# Altium PCB PCB_Power_Measurement.PcbDoc (part 1 of 2)
Units mil, origin at the board's own origin, x right, y up, seen from the top; angles counter-clockwise.
Board outline 2558.96 x 1849.37 mil, 4 copper layers (Top Layer, Layer 1, Layer 2, Bottom Layer), stack 22.4 mil thick; 69 components, 59 nets, 316 pads, 95 vias.
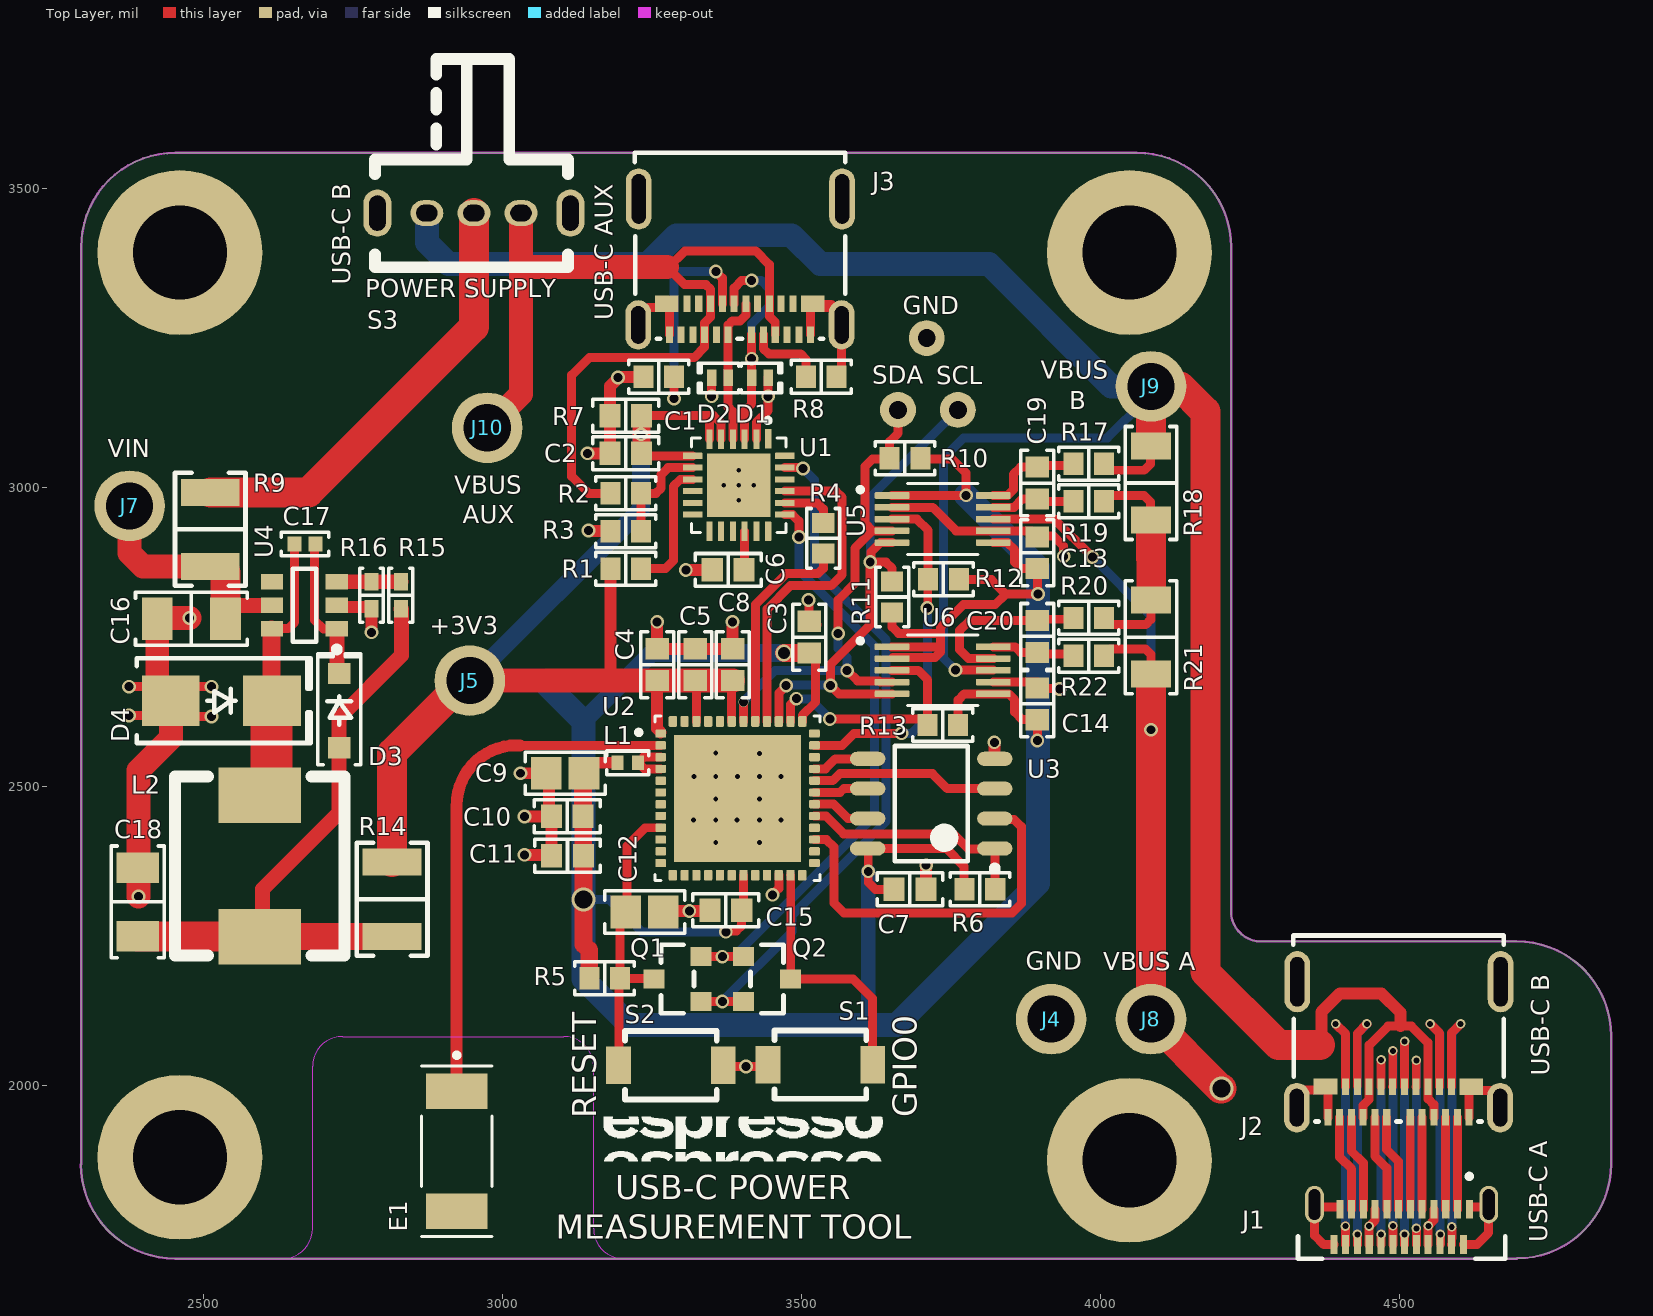
[diagram p0: Top Layer view]
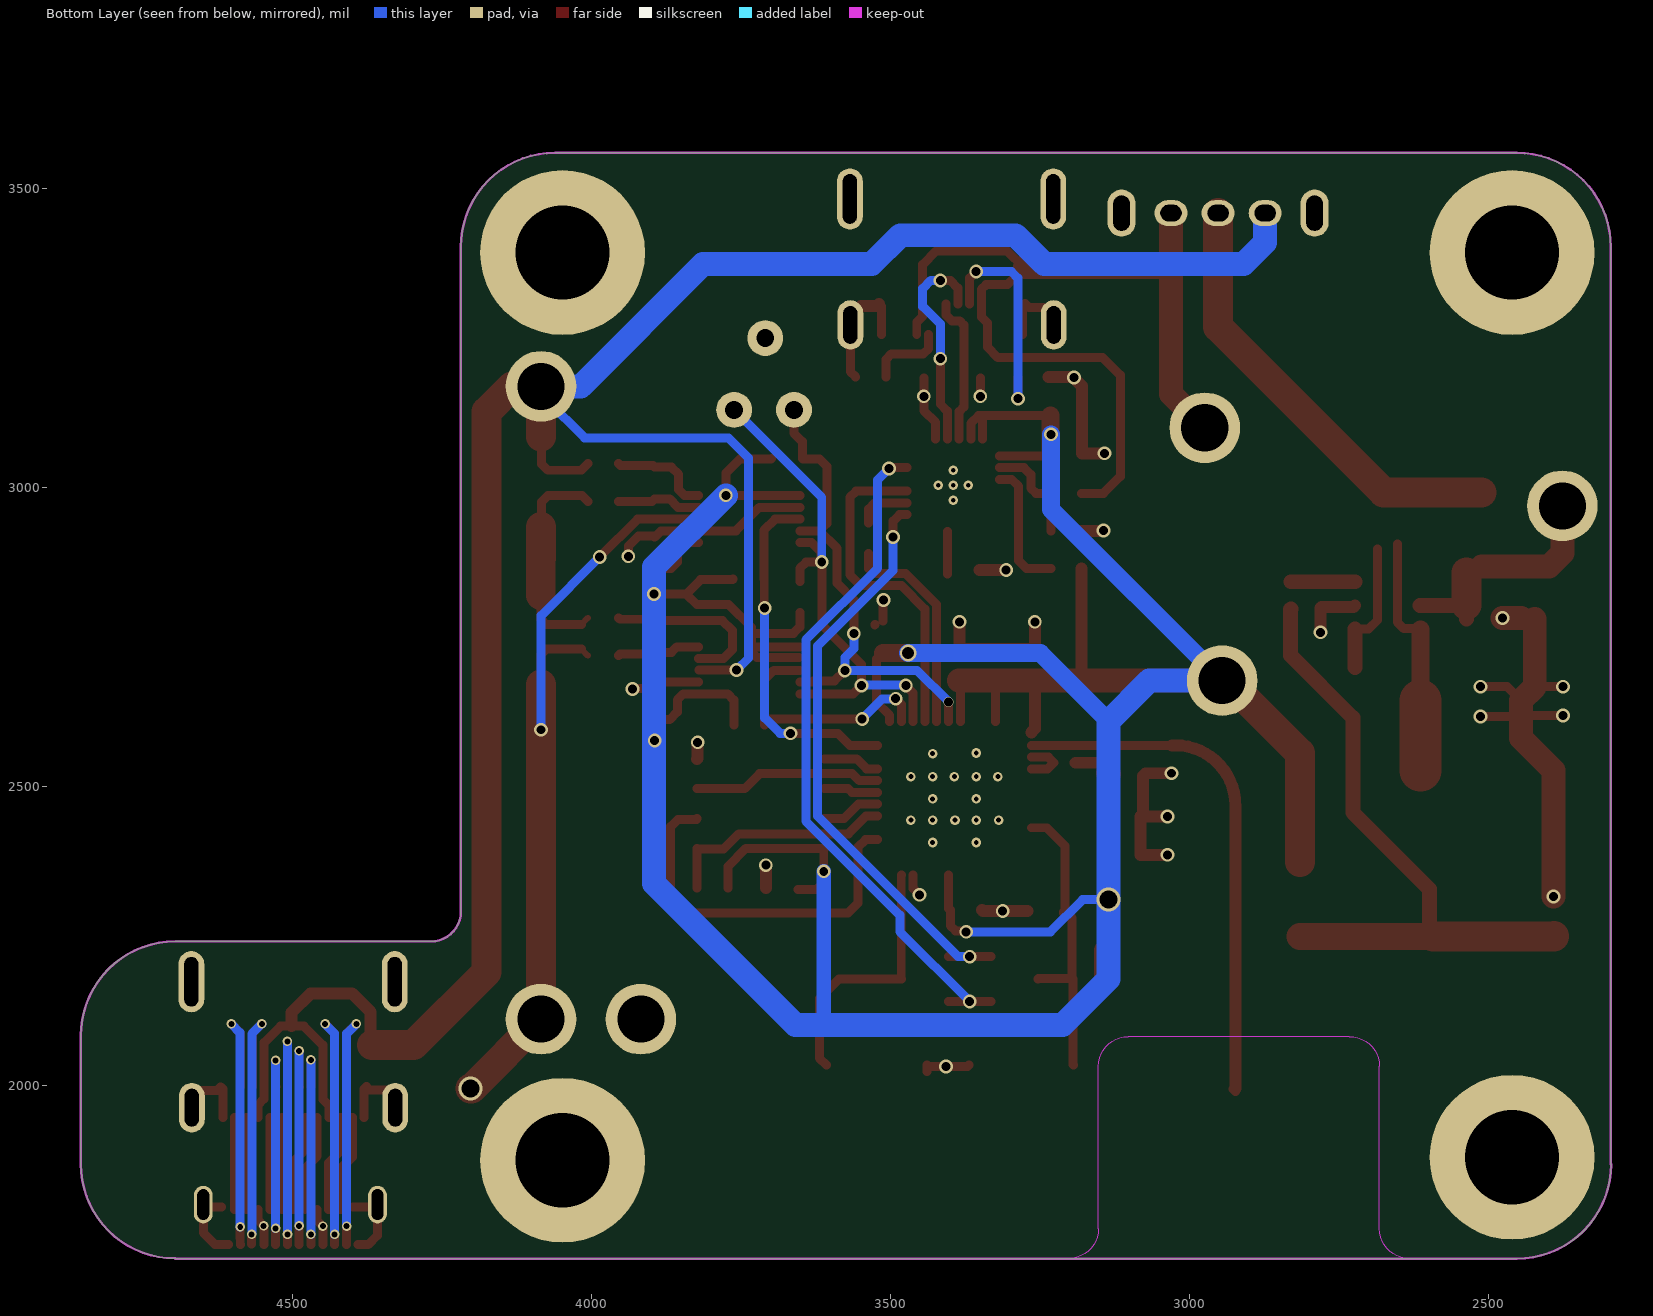
[diagram p1: Bottom Layer view, seen from below]
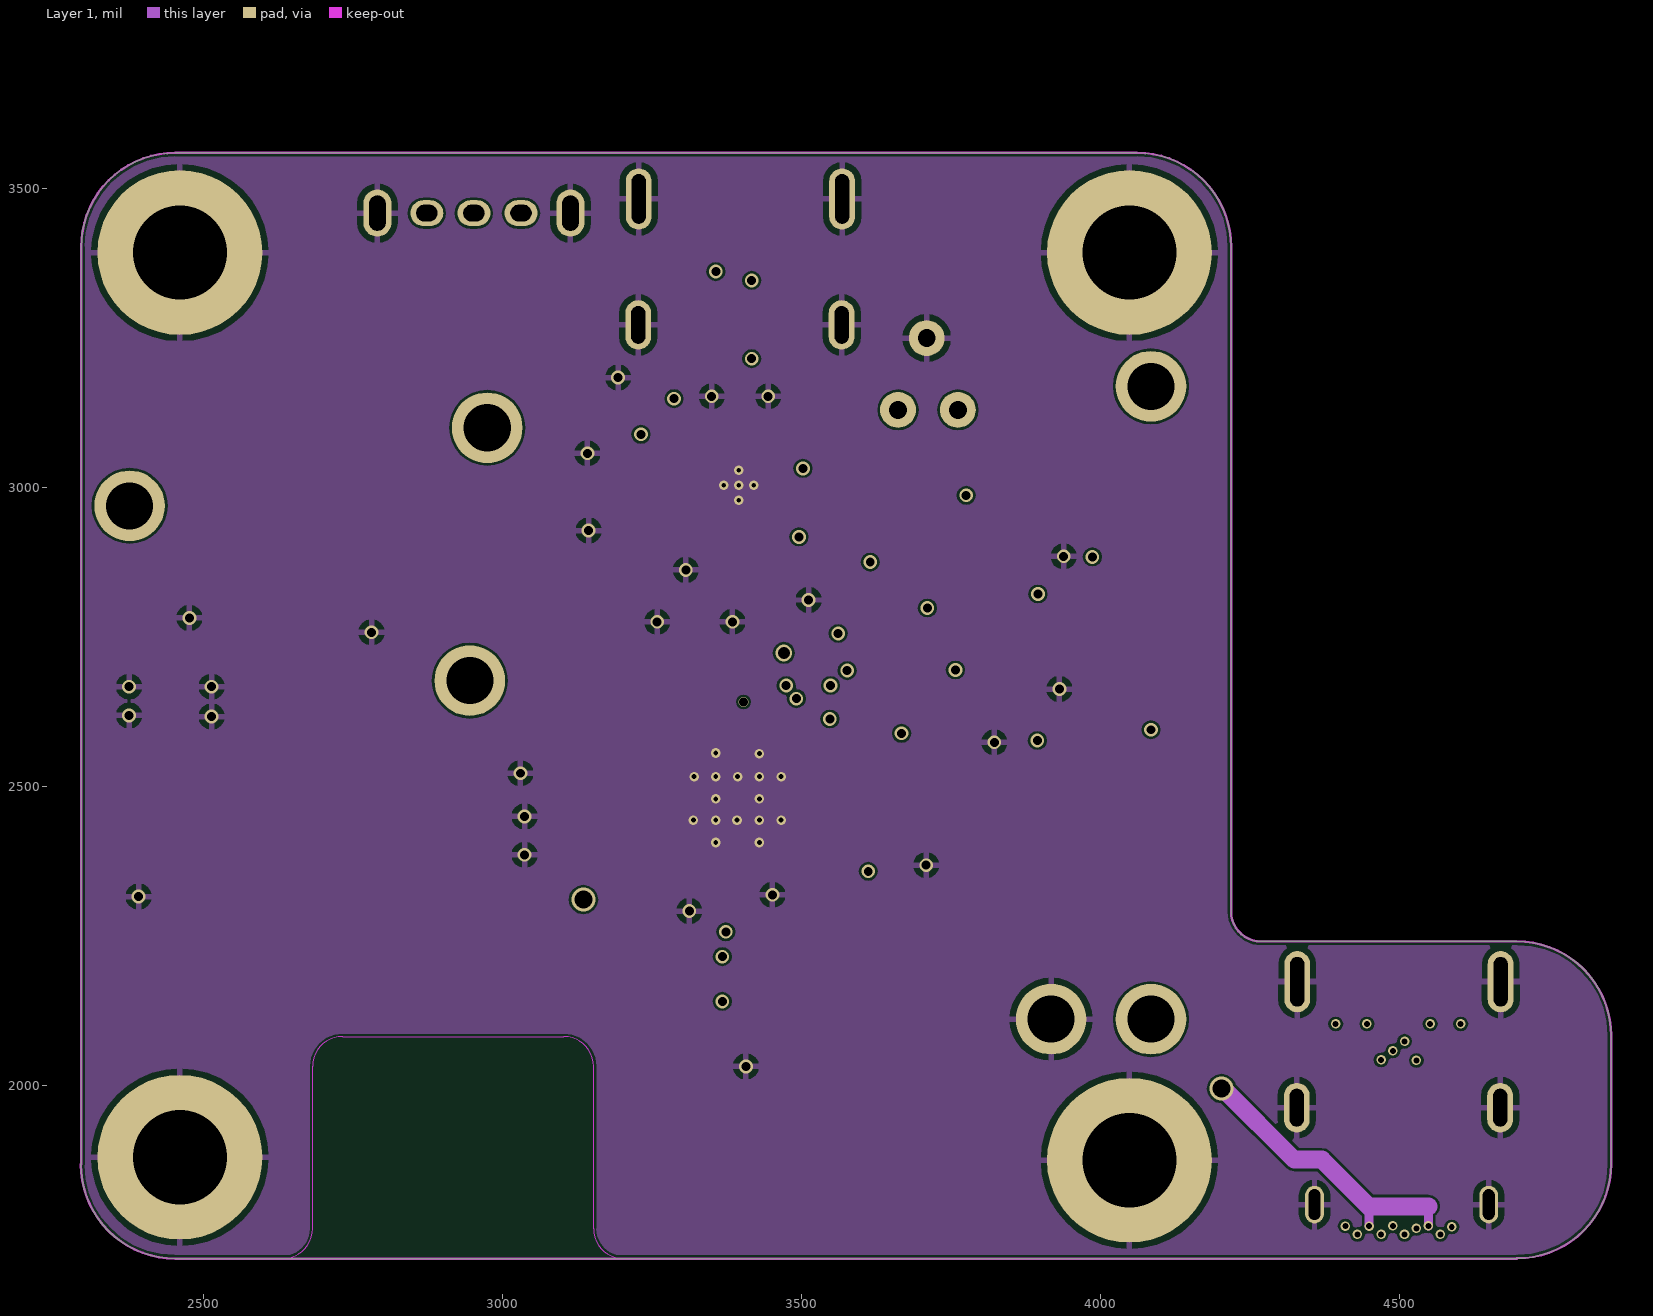
[diagram p2: Layer 1]
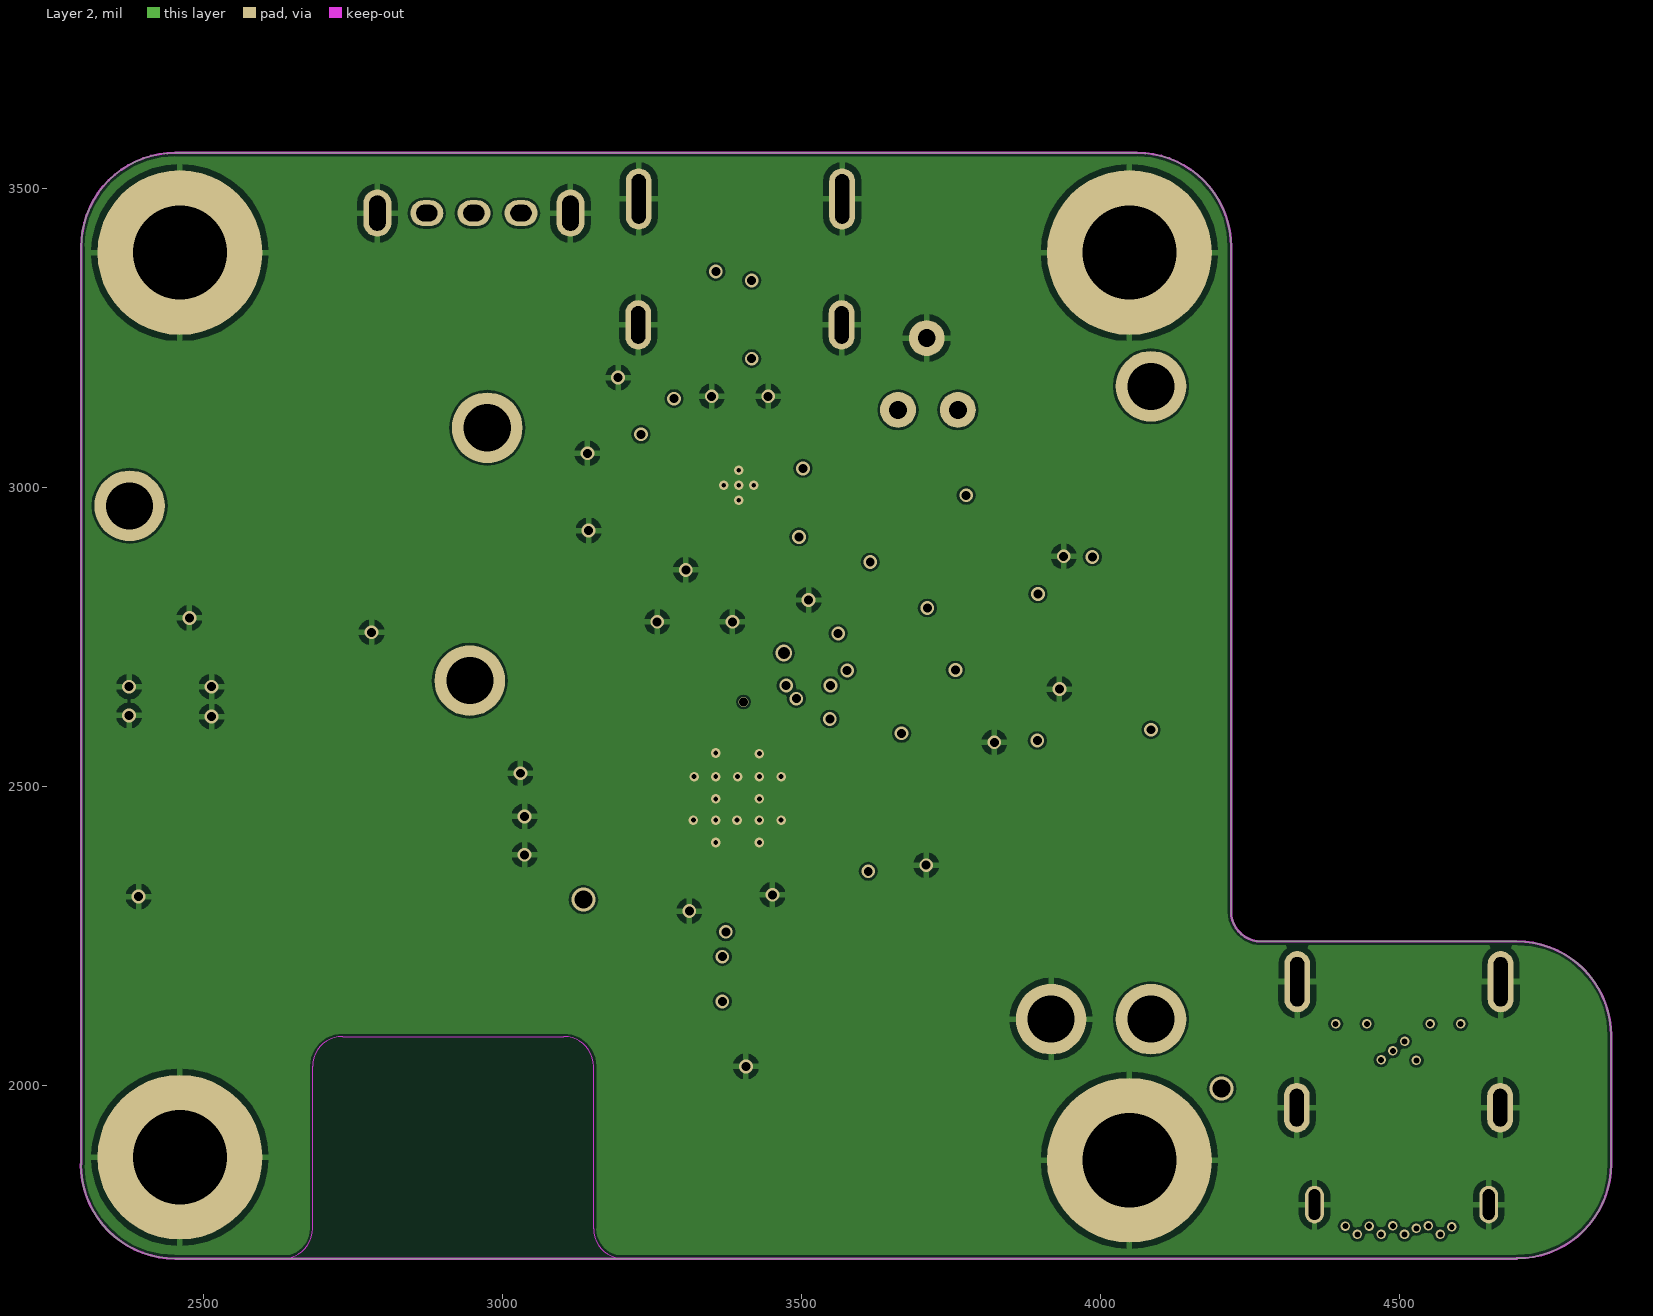
[diagram p3: Layer 2]

## Layer stack, top to bottom
Top Solder: solder mask 0.4, Solder Resist, Dk 3.5
Top Layer: signal copper 1.4
Dielectric 2: prepreg 2.8, PP-006, Dk 4.1
Layer 1: signal copper 0.7
Dielectric 1: dielectric 12.6, FR-4, Dk 4.8
Layer 2: signal copper 0.7
Dielectric 3: prepreg 2.8, PP-006, Dk 4.1
Bottom Layer: signal copper 1.4
Bottom Solder: solder mask 0.4, Solder Resist, Dk 3.5

## Board outline
2296,1868.59 2296,3402.52 cw(c2453.48,3402.52) 2453.48,3560 4061.52,3560 cw(c4061.52,3402.52) 4219,3402.52 4219,2291 ccw(c4269,2291) 4269,2241 4697,2241 cw(c4697,2083.52) 4854.48,2083.52 4854.48,1868.48 cw(c4697,1868.48) 4697,1711 4696.63,1710.63 2453,1710.63 cw(c2453,1868.11)

## Design rules (kind name [scope] priority, off if disabled: settings)
Clearance [All] p1: gap=4 ignorepadtopadclearanceinfootprint=FALSE except(0: Arc-Hole Track-Hole SMDPad-Hole THPad-Hole Via-Hole Fill-Hole Poly-Hole Region-Hole Text-Hole)
HoleSize [All] p1: absolutevalues=TRUE maxlimit=196.85 minlimit=1 maxpercent=80.000 minpercent=20.000
PolygonConnect PolygonConnect_1 [All vs IsNamedPolygon('FTDI-GND-2') Or  IsNamedPolygon('FTDI-GND-1') Or  IsNamedPolygon('ESP-GND-2') Or  IsNamedPolygon('ESP-GND-1')] p1: connectstyle=Direct reliefconductorwidth=10 reliefentries=4 polygonreliefangle="90 Angle" airgapwidth=10
PolygonConnect [All] p2: connectstyle=Relief reliefconductorwidth=10 reliefentries=4 polygonreliefangle="90 Angle" airgapwidth=10
RoutingVias [All] p1: holewidth=28 width=50 viastyle="Through Hole" minholewidth=28 minwidth=50 maxholewidth=28 maxwidth=50
SilkToSilkClearance [All] p1 off: silktosilkclearance=10
SilkToSolderMaskClearance [IsPad] p1: minsilkscreentomaskgap=3 clearancetoexposedcopper=TRUE
SolderMaskExpansion [All] p1: expansion=4
Width [All] p1: maxlimit=100 minlimit=5 preferedwidth=10
27 further rules are at their usual default settings.

## Classes and differential pairs
component class USB-C_Connectors: D1 D2 J1 J2 J3 R7 R8
component class Power_Regulation: C16 C17 C18 D3 D4 J4 J5 J7 J8 J9 J10 L2 R9 R14 R15 R16 S3 U4
component class Power_Measurement: C13 C14 C19 C20 R10 R11 R12 R13 R17 R18 R19 R20 R21 R22 U5 U6
component class Microcontroller: C1 C2 C3 C4 C5 C6 C7 C8 C9 C10 C11 C12 C15 E1 L1 Q1 Q2 R1 R2 R3 R4 R5 R6 S1 S2 U1 U2 U3

## Components (designator, comment, footprint, x,y, rotation, side; value= is the part's Value field where it differs from the comment)
C1 "0.1 µF" "CAP 0603_1608" 3206.69,3120.28 r0 top
C2 "1 µF" "CAP 0603_1608" 3206.69,3057.28 r180 top
C3 "0.1 µF" "CAP 0603_1608" 3513.43,2750 r270 top
C4 "0.1 µF" "CAP 0603_1608" 3259.25,2703.74 r90 top
C5 "100 pF" "CAP 0603_1608" 3322.83,2703.74 r270 top
C6 "4.7 µF" "CAP 0603_1608" 3377.95,2862.2 r180 top
C7 "1 µF" "CAP 0603_1608" 3682,2328 r0 top
C8 "1 µF" "CAP 0603_1608" 3385.83,2703.74 r270 top
C9 "10 µF" "CAP 0805_2012" 3105.31,2522.24 r0 top
C10 "1 µF" "CAP 0603_1608" 3108.82,2450.32 r0 top
C11 "0.1 µF" "CAP 0603_1608" 3109.25,2384.45 r0 top
C12 "10 µF" "CAP 0805_2012" 3238.19,2290.35 r180 top
C13 "0.1 µF" "CAP 0603_1608" 3895,2891 r90 top
C14 "0.1 µF" "CAP 0603_1608" 3895,2638.43 r270 top
C15 "0.1 µF" "CAP 0603_1608" 3374.02,2293.31 r0 top
C16 "10 µF" "CAP 1206_3216 - 0.8MM" 2480.32,2780.51 r0 top
C17 "10000 pF" "CAP 0402_1005" 2670.28,2905.51 r0 top
C18 "22 µF" "CAP 1206_3216 - 0.8MM" 2390.75,2307.09 r90 top
C19 "0.1 µF" "CAP 0603_1608" 3895,3007.63 r90 top
C20 "0.1 µF" "CAP 0603_1608" 3895,2751 r270 top
D1 "LXES15AAA1-153" 0402 3431.1,3183.54 r0 top
D2 "LXES15AAA1-153" 0402 3364.17,3183.54 r180 top
D3 "1N4148W-TP" SOD-123 2727.36,2626.97 r90 top
D4 "B230-13-F" "DO214AA SMB" 2530.51,2643.7 r0 top
E1 "NN01-102" XCVR_NN01-102 2924,1890 r270 top
J1 "USB4155-03-C_REVA" GCT_USB4155-03-C_REVA 4504.17,1763.53 r0 top
J2 "1054500101" "Molex 1054500101" 4498.95,1972.61 r180 top
J3 "1054500101" "Molex 1054500101" 3397.64,3281.69 r180 top
J4 "Large Board Solder Point" "Large Solder Point"#1 3918,2111 r0 top
J5 "Large Board Solder Point" "Large Solder Point"#1 2945.87,2677.17 r0 top
J7 "Large Board Solder Point" "Large Solder Point"#1 2376.97,2969.49 r0 top
J8 "Large Board Solder Point" "Large Solder Point"#1 4085,2111 r0 top
J9 "Large Board Solder Point" "Large Solder Point"#2 4085,3187.99 r0 top
J10 "Large Board Solder Point" "Large Solder Point"#1 2975,3100 r0 top
L1 "2 nH" "IND 0402_1005" 3210,2539.8 r180 top
L2 "10uH" 0630CDMCCDS-100MC 2594.49,2367.13 r270 top
Q1 "MMSS8050-H-TP" "MCCSEMI SOT-23-3" 3293.31,2178.15 r180 top
Q2 "MMSS8050-H-TP" "MCCSEMI SOT-23-3" 3442.91,2178.15 r0 top
R1 "4.7 kOhms" "RES 0603_1608" 3206.69,2864.37 r180 top
R2 "24 kOhms" "RES 0603_1608" 3206.69,2990.35 r180 top
R3 "47 kOhms" "RES 0603_1608" 3206.69,2927.17 r0 top
R4 "510 Ohms" "RES 0603_1608" 3537,2915 r90 top
R5 "10 kOhms" "RES 0603_1608" 3171.26,2179.13 r0 top
R6 "10 kOhms" "RES 0603_1608" 3799,2328 r0 top
R7 "5.1 kOhms" "RES 0603_1608" 3261.81,3185.04 r0 top
R8 "5.1 kOhms" "RES 0603_1608" 3533.46,3185.04 r0 top
R9 "0 Ohms" "RES 1210_3225" 2511.81,2930.12 r270 top
R10 "10 kOhms" "RES 0603_1608" 3673.59,3049 r180 top
R11 "10 kOhms" "RES 0603_1608" 3652,2817 r90 top
R12 "10 kOhms" "RES 0603_1608" 3738,2847 r180 top
R13 "10 kOhms" "RES 0603_1608" 3737,2603 r180 top
R14 "0 Ohms" "RES 1210_3225" 2815.94,2311.52 r90 top
R15 "100 kOhms" "RES 0402_1005" 2830.71,2819.88 r270 top
R16 "32.4 kOhms" "RES 0402_1005" 2781.5,2819.88 r90 top
R17 "10 Ohms" "RES 0603_1608" 3981,3040 r180 top
R18 "2 mOhms" "STACKPOLE CSR1206" 4085,3007.64 r90 top
R19 "10 Ohms" "RES 0603_1608" 3981,2977 r180 top
R20 "10 Ohms" "RES 0603_1608" 3981,2782 r180 top
R21 "2 mOhms" "STACKPOLE CSR1206" 4085,2750 r90 top
R22 "10 Ohms" "RES 0603_1608" 3981,2719 r180 top
S1 "GT-TC029B-H025-L1N" GT-TC029B-H025-L1N 3532,2035 r180 top
S2 "GT-TC029B-H025-L1N" GT-TC029B-H025-L1N 3282,2034 r180 top
S3 "SK-12D02-VG5" SK-12D02-VG5 2952.76,3459 r180 top
U1 "CP2104-F03-GM" QFN50P400X400X80-25N 3395.67,3003.94 r270 top
U2 "ESP32-PICO-D4" PQFN50P700X700X104-49N 3393.7,2480.31 r0 top
U3 "LY68L6400" SOP-8_3.9x4.9x1.27P 3717.52,2471.46 r180 top
U4 "RT8258GE" SOT100P279X130-6N 2669.29,2803.15 r180 top
U5 "INA226AIDGSR" SOP50P490X110-10N 3736.65,2947.37 r0 top
U6 "INA226AIDGSR" SOP50P490X110-10N 3736.65,2694.35 r0 top

## Footprints (in the part's own frame and the unit in brackets; to place one, negate y for a bottom-side part, rotate by r counter-clockwise, add the part's x,y. Pads: shape width x height; smd on the part's side, far side on the other; paste and mask are expansions set on the pad)
0402 [mm] "SODFL, 2-Leads, Body 0.675x1.075mm, IPC Medium Density"
  rect 0.4x0.7 smd: 1(-0.35,0) 2(0.35,0)
  silkscreen extent -0.8,-0.63 0.92,0.63, body extent -0.51,-0.31 0.5,0.3, height 0.45
0630CDMCCDS-100MC [mm] "SMD,7x6.6x2.8mm"
  rect 2.35x3.5 smd: 1(-3,0) 2(3,0)
  silkscreen extent -3.8,-3.6 3.8,3.6, body extent -3.5,-3.3 3.5,3.3, height 3
"CAP 0402_1005" [mm] "Chip Capacitor, 2-Leads, Body 1.02x0.51mm, IPC Medium Density"
  rect 0.6x0.64 smd: 1(-0.44,0) 2(0.44,0)
  silkscreen extent -1,-0.5 1,0.5, body extent -0.5,-0.26 0.5,0.26, height 0.52
"CAP 0603_1608" [mm] "Chip Capacitor, 2-Leads, Body 1.60x0.80mm, IPC Medium Density"
  rect 0.9x1 smd: 1(-0.675,0) 2(0.675,0)
  silkscreen extent -1.4,-0.7 1.4,0.7, body extent -0.8,-0.41 0.8,0.41, height 0.82
"CAP 0805_2012" [mm] "Chip Capacitor, 2-Leads, Body 2.00x1.20mm, IPC Medium Density"
  rect 1.3x1.4 smd mask+0.051: 1(-0.8,0) 2(0.8,0)
  silkscreen extent -1.7,-0.9 1.7,0.9, body extent -1,-0.64 1,0.64, height 1.26
"CAP 1206_3216 - 0.8MM" [mm] "Chip Capacitor, 2-Leads, Body 3.25x1.60mm, IPC Medium Density"
  rect 1.3x1.8 smd: 1(-1.45,0) 2(1.45,0)
  silkscreen extent -2.37,-1.12 2.37,1.12, body extent -1.6,-0.8 1.6,0.8, height 0.8
"DO214AA SMB" [mm] "Molded Diode, 2-Leads, Body 4.31x3.62mm, IPC Medium Density"
  rect 2.45x2.15 smd: 1(-2.15,0) 2(2.15,0)
  silkscreen extent -3.6,-1.8 3.8,1.8, body extent -2.6,-1.8 2.6,1.8, height 2.4
GCT_USB4155-03-C_REVA [mm]
  rect 0.3x0.8 smd: A1(2.875,0.75) A2(2.375,0.75) A3(1.875,0.75) A4(1.375,0.75) A5(0.875,0.75) A6(0.375,0.75) A7(-0.125,0.75) A8(-0.625,0.75) A9(-1.125,0.75) A10(-1.625,0.75) A11(-2.125,0.75) A12(-2.625,0.75) B1(-2.875,-0.75) B2(-2.375,-0.75) B3(-1.875,-0.75) B4(-1.375,-0.75) B5(-0.875,-0.75) B6(-0.375,-0.75) B7(0.125,-0.75) B8(0.625,-0.75) B9(1.125,-0.75) B10(1.625,-0.75) B11(2.125,-0.75) B12(2.625,-0.75)
  oval 0.8x1.6 hole 0.5 slot 1.3 at 90 deg mask+0: S1(-3.7,0.95) S2(3.7,0.95)
  silkscreen extent -4.4,-1.35 4.4,2.25
GT-TC029B-H025-L1N [mm] "C843669 No NO SMDSplicing 50mA 3.9mm 100MO 100000 12V 250gf@±30gf 2.9mm -30?~+85? 2.5mm Black Round Button Brick nogging SPST SMD Tactile Switches ROHS"
  rect 1.05x1.6 smd: 1(-2.225,0) 2(2.225,0)
  silkscreen extent -1.95,-1.45 1.95,1.45
"IND 0402_1005" [mm] "Inductor, 2-Leads, Body 1.02x0.51mm, IPC Medium Density"
  rect 0.5x0.6 smd: 1(-0.44,0) 2(0.44,0)
  silkscreen extent -0.9,-0.5 0.9,0.5, body extent -0.5,-0.3 0.5,0.3, height 0.6
"Large Solder Point"#1 [mm]
  round 3 hole 2: 1(0,0)
"Large Solder Point"#2 [mm]
  round 3 hole 2: 1(0,-0.475)
"MCCSEMI SOT-23-3" [mm] "SOT23, 3-Leads, Body 2.92x2.37mm, Pitch 0.95mm, IPC Medium Density"
  rect 0.9x0.8 smd: 1(-1,0.95) 2(-1,-0.95) 3(1,0)
  silkscreen extent -0.7,-1.45 0.7,1.45, body extent -1.16,-1.45 1.16,1.45, height 1.5
"Molex 1054500101" [mm] "USB-C Receptacle Connector 24 Position Surface Mount, 24 Position, Body 8.94x7.90mm"
  rect 0.3x0.7 smd mask+0.051: A1(-3,0.655) A2(-2.5,0.655) A3(-2,0.655) A4(-1.5,0.655) A5(-1,0.655) A6(-0.5,0.655) A7(0.5,0.655) A8(1,0.655) A9(1.5,0.655) A10(2,0.655) A11(2.5,0.655) A12(3,0.655) B2(2.25,-0.645) B3(1.75,-0.645) B4(1.25,-0.645) B5(0.75,-0.645) B6(0.25,-0.645) B7(-0.25,-0.645) B8(-0.75,-0.645) B9(-1.25,-0.645) B10(-1.75,-0.645) B11(-2.25,-0.645)
  rect 1x0.7 smd mask+0.051: B1(3.1,-0.655) B12(-3.1,-0.645)
  oval 1.1x2.6 hole 2.1 slot 0.6 at 0 deg: S(-4.34,-5.105) S(4.3,-5.105)
  oval 1.1x2.1 hole 1.6 slot 0.6 at 0 deg: S(-4.32,0.245) S(4.32,0.245)
  silkscreen extent -4.47,-7.07 4.47,0.83, body extent -4.47,-7.07 4.47,0.83, height 3.21
PQFN50P700X700X104-49N [mm]
  rrect25% 0.45x0.35 smd mask+0.051: 1(-3.265,2.75) 2(-3.265,2.25) 3(-3.265,1.75) 4(-3.265,1.25) 5(-3.265,0.75) 6(-3.265,0.25) 7(-3.265,-0.25) 8(-3.265,-0.75) 9(-3.265,-1.25) 10(-3.265,-1.75) 11(-3.265,-2.25) 12(-3.265,-2.75) 25(3.265,-2.75) 26(3.265,-2.25) 27(3.265,-1.75) 28(3.265,-1.25) 29(3.265,-0.75) 30(3.265,-0.25) 31(3.265,0.25) 32(3.265,0.75) 33(3.265,1.25) 34(3.265,1.75) 35(3.265,2.25) 36(3.265,2.75)
  rrect25% 0.35x0.45 smd mask+0.051: 13(-2.75,-3.265) 14(-2.25,-3.265) 15(-1.75,-3.265) 16(-1.25,-3.265) 17(-0.75,-3.265) 18(-0.25,-3.265) 19(0.25,-3.265) 20(0.75,-3.265) 21(1.25,-3.265) 22(1.75,-3.265) 23(2.25,-3.265) 24(2.75,-3.265) 37(2.75,3.265) 38(2.25,3.265) 39(1.75,3.265) 40(1.25,3.265) 41(0.75,3.265) 42(0.25,3.265) 43(-0.25,3.265) 44(-0.75,3.265) 45(-1.25,3.265) 46(-1.75,3.265) 47(-2.25,3.265) 48(-2.75,3.265)
  rect 5.4x5.4 smd paste-4 mask+0.051: 49(0,0)
  silkscreen extent -4.3,-3.5 3.5,3.5, body extent -3.5,-3.5 3.5,3.5, height 1.04
QFN50P400X400X80-25N [mm]
  rrect7% 0.84x0.26 smd mask+0.051: 1(-1.97,1.25)
  rrect7% 0.82x0.26 smd mask+0.051: 2(-1.955,0.75) 3(-1.955,0.25) 4(-1.955,-0.25) 5(-1.955,-0.75) 6(-1.955,-1.25) 13(1.955,-1.25) 14(1.955,-0.75) 15(1.955,-0.25) 16(1.955,0.25) 17(1.955,0.75) 18(1.955,1.25)
  rrect7% 0.26x0.82 smd mask+0.051: 7(-1.25,-1.955) 8(-0.75,-1.955) 9(-0.25,-1.955) 10(0.25,-1.955) 11(0.75,-1.955) 12(1.25,-1.955) 19(1.25,1.955) 20(0.75,1.955) 21(0.25,1.955) 22(-0.25,1.955) 23(-0.75,1.955) 24(-1.25,1.955)
  rect 2.7x2.7 smd paste-2 mask+0.051: 25(0,0)
  silkscreen extent -2.85,-2 2,2, body extent -2,-2 2,2, height 0.8
"RES 0402_1005" [mm] "Chip Resistor, 2-Leads, Body 1.0x0.5mm, IPC Medium Density"
  rect 0.75x0.6 smd: 1(-0.575,0) 2(0.575,0)
  silkscreen extent -1.14,-0.51 1.14,0.51, body extent -0.5,-0.25 0.5,0.25, height 0.35
"RES 0603_1608" [mm] "Chip Resistor, 2-Leads, Body 1.60x0.80mm, IPC Medium Density"
  rect 0.85x0.95 smd: 1(-0.65,0) 2(0.65,0)
  silkscreen extent -1.27,-0.7 1.27,0.7, body extent -0.8,-0.4 0.8,0.4, height 0.45
"RES 1210_3225" [mm] "Chip Resistor, 2-Leads, Body 3.1x2.6mm, IPC Medium Density"
  rect 1.15x2.5 smd: 1(-1.575,0) 2(1.575,0)
  silkscreen extent -2.4,-1.5 2.4,1.5, body extent -1.6,-1.25 1.6,1.25, height 0.7
SK-12D02-VG5 [mm] "SPDT Switch"
  oval 1.4x1.1 hole 0.7 slot 0.9 at 0 deg: 1(-2,0) 2(0,0) 3(2,0)
  oval 1.2x2 hole 1.5 slot 0.7 at 0 deg: 4(4.1,0) 5(-4.1,0)
  silkscreen extent -4,-6.55 4.2,2.3
SOD-123 [mm] "SOD, 2-Leads, Body 1.55x3.70mm, IPC Medium Density"
  rect 0.9x0.95 smd: 1(-1.575,0) 2(1.575,0)
  silkscreen extent -2.3,-0.92 2.41,0.92, body extent -1.86,-0.78 1.86,0.77, height 1.35
SOP50P490X110-10N [mm]
  rrect25% 1.47x0.28 smd: 1(-2.15,1) 2(-2.15,0.5) 3(-2.15,0) 4(-2.15,-0.5) 5(-2.15,-1) 6(2.15,-1) 7(2.15,-0.5) 8(2.15,0) 9(2.15,0.5) 10(2.15,1)
  silkscreen extent -3.6,-1.5 1.5,1.5, body extent -2.45,-1.5 2.45,1.5, height 1.1
SOP-8_3.9x4.9x1.27P [mm] "SOP, 8-Leads, Body 4.90x3.90mm, Pitch 1.27mm, IPC Medium Density"
  oval 1.5x0.6 smd: 1(-2.7,1.905) 2(-2.7,0.635) 3(-2.7,-0.635) 4(-2.7,-1.905) 5(2.7,-1.905) 6(2.7,-0.635) 7(2.7,0.635) 8(2.7,1.905)
  silkscreen extent -2.83,-2.45 1.55,2.88, body extent -1.95,-2.45 1.95,2.45, height 1.75
SOT100P279X130-6N [mm] "SOT23, 6-Leads, Body 2.90x2.79mm, Pitch 1.00mm, IPC Medium Density"
  rect 0.95x0.65 smd: 1(-1.375,1) 2(-1.375,0) 3(-1.375,-1) 4(1.375,-1) 5(1.375,0) 6(1.375,1)
  silkscreen extent -1.5,-1.55 0.5,2, body extent -0.9,-1.55 0.9,1.55, height 1.3
"STACKPOLE CSR1206" [mm] "Chip Resistor, 2-Leads, Body 3.13x1.55mm, IPC Medium Density"
  rect 1.15x1.7 smd: 1(-1.575,0) 2(1.575,0)
  silkscreen extent -2.4,-1.1 2.4,1.1, body extent -1.6,-0.78 1.6,0.77, height 0.55
XCVR_NN01-102 [mm]
  rect 1.5x2.6 smd: 1(-2.55,0) 2(2.55,0)
  silkscreen extent -4.18,-1.5 3.62,1.5, body extent -3.5,-1.5 3.5,1.5, height 2.2

## Part data
C1 C3 C4 C11 C13 C14 C15 C19 C20: library part C0603C104K5RAC7411, "CAP CER 0.1UF 50V X7R 0603", Device Package="0603 (1608 Metric)", manufacturer=KEMET, Operating Temperature="-55°C ~ 125°C", Supplier Part Number 1=399-7374-2-ND, Temperature Coefficient=X7R, Tolerance=±10%, Voltage - Rated=50V, Applications="Bypass, Decoupling", Capacitance="0.1 µF", componentlink1description=Datasheet, componentlink1url=https://api.kemet.com/component-edge/download/datasheet/C0603C104K5RAC7411.pdf, componentlink2description="DigiKey Link", componentlink2url=https://www.digikey.com/en/products/detail/kemet/C0603C104K5RAC7411/3317013, lastupdated="21/08/2022 8:00:52 PM", Lifecycle Status=Active, Minimum Order=15000, Mounting Type="Surface Mount, MLCC", Package / Case="0603 (1608 Metric)", packaging=TapeAndReel, partid=2233, Part Number=C0603C104K5RAC7411, Part Status=Active, price=0.01, series="SMD Comm X7R", Size / Dimension="0.063\" L x 0.031\" W (1.60mm x 0.80mm)", Supplier 1=DigiKey, Thickness (Max)="0.035\" (0.90mm)"
C2 C7 C8 C10: library part CC0603KRX7R6BB105, "CAP CER 1UF 10V X7R 0603", Device Package="0603 (1608 Metric)", manufacturer=Yageo, Operating Temperature="-55°C ~ 125°C", Supplier Part Number 1=311-1796-1-ND, Temperature Coefficient=X7R, Tolerance=±10%, Voltage - Rated=10V, Applications="General Purpose", Capacitance="1 µF", componentlink1description=Datasheet, componentlink1url=https://www.yageo.com/upload/media/product/productsearch/datasheet/mlcc/UPY-GPHC_X7R_6.3V-to-50V_18.pdf, componentlink2description="DigiKey Link", componentlink2url=https://www.digikey.com/en/products/detail/yageo/CC0603KRX7R6BB105/5195204, lastupdated="21/08/2022 8:00:52 PM", Lifecycle Status=Active, Minimum Order=1, Mounting Type="Surface Mount, MLCC", Package / Case="0603 (1608 Metric)", packaging=TapeAndReel, partid=2290, Part Number=CC0603KRX7R6BB105, Part Status=Active, price=0.02, series=CC, Size / Dimension="0.063\" L x 0.031\" W (1.60mm x 0.80mm)", Supplier 1=DigiKey, Thickness (Max)="0.035\" (0.90mm)"
C5: library part C0603C101K5GACAUTO, "CAP CER 100PF 50V C0G/NP0 0603", Device Package="0603 (1608 Metric)", manufacturer=KEMET, Operating Temperature="-55°C ~ 125°C", Ratings=AEC-Q200, Supplier Part Number 1=399-6843-1-ND, Temperature Coefficient="C0G, NP0", Tolerance=±10%, Voltage - Rated=50V, Applications=Automotive, Capacitance="100 pF", componentlink1description=Datasheet, componentlink1url=https://api.kemet.com/component-edge/download/datasheet/C0603C101K5GACAUTO.pdf, componentlink2description="DigiKey Link", componentlink2url=https://www.digikey.com/en/products/detail/kemet/C0603C101K5GACAUTO/3314842, Features="Low ESL", lastupdated="25/08/2022 6:49:41 AM", Lifecycle Status=Active, Minimum Order=1, Mounting Type="Surface Mount, MLCC", Package / Case="0603 (1608 Metric)", packaging=TapeAndReel, partid=2201, Part Number=C0603C101K5GACAUTO, Part Status=Active, price=0.01, series="SMD Auto C0G", Size / Dimension="0.063\" L x 0.031\" W (1.60mm x 0.80mm)", Supplier 1=DigiKey, Thickness (Max)="0.034\" (0.87mm)"
C6: library part GRM188Z71C475KE21J, "CAP CER 4.7UF 16V X7R 0603", Device Package="0603 (1608 Metric)", manufacturer="Murata Electronics", Operating Temperature="-55°C ~ 125°C", Supplier Part Number 1=490-GRM188Z71C475KE21JCT-ND, Temperature Coefficient=X7R, Tolerance=±10%, Voltage - Rated=16V, Applications="General Purpose", Capacitance="4.7 µF", componentlink1description=Datasheet, componentlink1url=https://search.murata.co.jp/Ceramy/image/img/A01X/G101/ENG/GRM188Z71C475KE21-01A.pdf, componentlink2description="DigiKey Link", componentlink2url=https://www.digikey.com/en/products/detail/murata-electronics/GRM188Z71C475KE21J/16033436, lastupdated="21/08/2022 7:59:26 PM", Lifecycle Status=Active, Minimum Order=1, Mounting Type="Surface Mount, MLCC", Package / Case="0603 (1608 Metric)", packaging=TapeAndReel, partid=41988, Part Number=GRM188Z71C475KE21J, Part Status=Active, price=0.04, series=GRM, Size / Dimension="0.063\" L x 0.031\" W (1.60mm x 0.80mm)", Supplier 1=DigiKey, Thickness (Max)="0.039\" (1.00mm)"
C9 C12: library part CGA4J1X7R0J106K125AC, "CAP CER 10UF 6.3V X7R 0805", Device Package="0805 (2012 Metric)", manufacturer="TDK Corporation", Operating Temperature="-55°C ~ 125°C", Ratings=AEC-Q200, Supplier Part Number 1=445-6971-1-ND, Temperature Coefficient=X7R, Tolerance=±10%, Voltage - Rated=6.3V, Applications=Automotive, Capacitance="10 µF", componentlink1description=Datasheet, componentlink1url=https://product.tdk.com/info/en/catalog/datasheets/mlcc_automotive_general_en.pdf?ref_disty=digikey, componentlink2description="DigiKey Link", componentlink2url=https://www.digikey.com/en/products/detail/tdk-corporation/CGA4J1X7R0J106K125AC/2672864, lastupdated="21/08/2022 8:04:19 PM", Lifecycle Status=Active, Minimum Order=1, Mounting Type="Surface Mount, MLCC", Package / Case="0805 (2012 Metric)", packaging=TapeAndReel, partid=3016, Part Number=CGA4J1X7R0J106K125AC, Part Status=Active, price=0.07, series=CGA, Size / Dimension="0.079\" L x 0.049\" W (2.00mm x 1.25mm)", Supplier 1=DigiKey, Thickness (Max)="0.057\" (1.45mm)"
C16: library part GRM31CR71E106MA12K, "CAP CER 10UF 25V X7R 1206", Device Package="1206 (3216 Metric)", manufacturer="Murata Electronics", Operating Temperature="-55°C ~ 125°C", Supplier Part Number 1=490-GRM31CR71E106MA12KCT-ND, Temperature Coefficient=X7R, Tolerance=±20%, Voltage - Rated=25V, Applications="General Purpose", Capacitance="10 µF", componentlink1description=Datasheet, componentlink1url=https://search.murata.co.jp/Ceramy/image/img/A01X/G101/ENG/GRM31CR71E106MA12-01CA.pdf, componentlink2description="DigiKey Link", componentlink2url=https://www.digikey.com/en/products/detail/murata-electronics/GRM31CR71E106MA12K/13904832, lastupdated="9/08/2022 12:05:16 PM", Lifecycle Status=Active, Minimum Order=1, Mounting Type="Surface Mount, MLCC", Package / Case="1206 (3216 Metric)", packaging=TapeAndReel, partid=30277, Part Number=GRM31CR71E106MA12K, Part Status=Active, price=0.07, series=GRM, Size / Dimension="0.126\" L x 0.063\" W (3.20mm x 1.60mm)", Supplier 1=DigiKey, Thickness (Max)="0.071\" (1.80mm)"
C17: library part VJ0402Y103JXQCW1BC, "CAP CER 10000PF 10V X7R 0402", Device Package="0402 (1005 Metric)", manufacturer="Vishay Vitramon", Operating Temperature="-55°C ~ 125°C", Supplier Part Number 1=720-1645-1-ND, Temperature Coefficient=X7R, Tolerance=±5%, Voltage - Rated=10V, Applications="General Purpose", Capacitance="10000 pF", componentlink1description=Datasheet, componentlink1url=https://www.vishay.com/docs/28548/vjw1bcbascomseries.pdf, componentlink2description="DigiKey Link", componentlink2url=https://www.digikey.com/en/products/detail/vishay-vitramon/VJ0402Y103JXQCW1BC/8301965, lastupdated="9/08/2022 12:01:13 PM", Lifecycle Status=Active, Minimum Order=1, Mounting Type="Surface Mount, MLCC", Package / Case="0402 (1005 Metric)", packaging=TapeAndReel, partid=4459, Part Number=VJ0402Y103JXQCW1BC, Part Status=Active, price=0.01, series=VJ, Size / Dimension="0.039\" L x 0.020\" W (1.00mm x 0.50mm)", Supplier 1=DigiKey, Thickness (Max)="0.022\" (0.55mm)"
C18: library part GCM31CR70J226KE23L, "CAP CER 22UF 6.3V X7R 1206", Device Package="1206 (3216 Metric)", manufacturer="Murata Electronics", Operating Temperature="-55°C ~ 125°C", Ratings=AEC-Q200, Supplier Part Number 1=490-4843-1-ND, Temperature Coefficient=X7R, Tolerance=±10%, Voltage - Rated=6.3V, Applications=Automotive, Capacitance="22 µF", componentlink1description=Datasheet, componentlink1url=https://www.murata.com/~/media/webrenewal/support/library/catalog/products/capacitor/mlcc/c03e.ashx?la=en-us, componentlink2description="DigiKey Link", componentlink2url=https://www.digikey.com/en/products/detail/murata-electronics/GCM31CR70J226KE23L/1763914, lastupdated="9/08/2022 12:05:38 PM", Lifecycle Status=Active, Minimum Order=1, Mounting Type="Surface Mount, MLCC", Package / Case="1206 (3216 Metric)", packaging=TapeAndReel, partid=19505, Part Number=GCM31CR70J226KE23L, Part Status=Active, price=0.19, series=GCM, Size / Dimension="0.126\" L x 0.063\" W (3.20mm x 1.60mm)", Supplier 1=DigiKey, Thickness (Max)="0.071\" (1.80mm)"
D1 D2: "TVS DIODE 4V 1005", Capacitance @ Frequency="0.05pF @ 1MHz", Device Package="0402 (1005 Metric)", manufacturer="Murata Electronics", Operating Temperature="-40°C ~ 85°C (TA)", Power Line Protection=No, Supplier Device Package=1005, Supplier Part Number 1=490-13210-2-ND, Voltage - Reverse Standoff (Typ)=4V, Applications="General Purpose", Bidirectional Channels=1, componentlink1description=Datasheet, componentlink1url=https://www.murata.com/en-us/products/productdata/8796832759838/CRESD-E.pdf, componentlink2description="DigiKey Link", componentlink2url=http://digikey.com/product-detail/en/murata-electronics/LXES15AAA1-153/490-13210-2-ND/5843762, lastupdated="9/08/2022 12:53:02 PM", Lifecycle Status=Active, Minimum Order=0, Mounting Type="Surface Mount", Package / Case="0402 (1005 Metric)", packaging=TapeAndReel, partid=10448, Part Number=LXES15AAA1-153, Part Status=Active, price=0.04, series=-, Supplier 1=DigiKey, Type=Zener
D3: "DIODE GEN PURP 100V 150MA SOD123", Capacitance @ Vr, F="2pF @ 0V, 1MHz", Current - Average Rectified (Io)=150mA, Current - Reverse Leakage @ Vr="1 µA @ 75 V", manufacturer="Micro Commercial Co", Operating Temperature - Junction="-65°C ~ 150°C", Package / Case=SOD-123, Supplier Part Number 1=1N4148WTPMSCT-ND, Voltage - DC Reverse (Vr) (Max)="100 V", Voltage - Forward (Vf) (Max) @ If="1.25 V @ 150 mA", componentlink1description=Datasheet, componentlink1url=https://www.mccsemi.com/pdf/Products/1N4148W(SOD123).pdf, componentlink2description="DigiKey Link", componentlink2url=https://www.digikey.com/en/products/detail/micro-commercial-co/1N4148W-TP/717196, Diode Type=Standard, lastupdated="9/08/2022 12:37:52 PM", Lifecycle Status=Active, Minimum Order=1, Mounting Type="Surface Mount", packaging=TapeAndReel, partid=999, Part Number=1N4148W-TP, Part Status=Active, price=0.02, Reverse Recovery Time (trr)="4 ns", series=-, Speed="Small Signal =< 200mA (Io), Any Speed", Supplier 1=DigiKey, Supplier Device Package=SOD-123
D4: "DIODE SCHOTTKY 30V 2A SMB", Capacitance @ Vr, F="200pF @ 4V, 1MHz", Current - Average Rectified (Io)=2A, Current - Reverse Leakage @ Vr="500 µA @ 30 V", manufacturer="Diodes Incorporated", Operating Temperature - Junction="-65°C ~ 150°C", Package / Case="DO-214AA, SMB", Supplier Device Package=SMB, Supplier Part Number 1=B230-FDICT-ND, Voltage - DC Reverse (Vr) (Max)="30 V", Voltage - Forward (Vf) (Max) @ If="500 mV @ 2 A", componentlink1description=Datasheet, componentlink1url=https://www.diodes.com/assets/Datasheets/ds13004.pdf, componentlink2description="DigiKey Link", componentlink2url=https://www.digikey.com/en/products/detail/diodes-incorporated/B230-13-F/814955, Diode Type=Schottky, lastupdated="9/08/2022 12:37:20 PM", Lifecycle Status=Active, Minimum Order=1, Mounting Type="Surface Mount", packaging=TapeAndReel, partid=1539, Part Number=B230-13-F, Part Status=Active, price=0.13, series=-, Speed="Fast Recovery =< 500ns, > 200mA (Io)", Supplier 1=DigiKey
E1: "2.45GHz Bluetooth, WLAN, Zigbee Chip RF Antenna 2.4GHz ~ 2.5GHz 1.7dBi Solder Surface Mount", Package=None, Availability=Unavailable, MF="{'manufacturer': u'Ignion'}", MP=NN01-102, price=None
J1 U5 U6: Package=None, Availability=Unavailable, price=None
  J1: MF="{'manufacturer': u'Global Connector Technology'}", MP=USB4155-03-C_REVA
  U5 U6: MF="{'manufacturer': u'Texas Instruments'}", MP=INA226AIDGSR
J2 J3: "CONN RCP USB3.1 TYPEC 24P SMD RA", Current Rating (Amps)="0.25A, 1A, 5A", manufacturer=Molex, Operating Temperature="-30°C ~ 85°C", Supplier Part Number 1=WM12856CT-ND, Voltage - Rated=30VAC/DC, componentlink1description=Datasheet, componentlink1url=https://www.molex.com/pdm_docs/ps/PS-105448-001.pdf, componentlink2description="DigiKey Link", componentlink2url=http://digikey.com/product-detail/en/molex/1054500101/WM12856CT-ND/5843891, Connector Type="USB - C (Type - C)", Gender=Receptacle, lastupdated="6/06/2020 2:14:04 AM", Lifecycle Status=Active, Mating Cycles=10000, Minimum Order=1, Mounting Feature=Horizontal, Mounting Type="Surface Mount, Right Angle; Through Hole", Number of Contacts=24, Number of Ports=1, packaging=TapeAndReel, Part Number=1054500101, Part Status=Active, price=1.22, series=105445, Shielding=Shielded, Specifications="USB 3.1 (USB 3.1 Gen 2, Superspeed+)", Supplier 1=DigiKey, Termination=Solder
L1: library part MHQ1005P2N0BT000, "FIXED IND 2NH 1A 50 MOHM SMD", Current Rating (Amps)="1 A", DC Resistance (DCR)="50mOhm Max", Device Package="0402 (1005 Metric)", Frequency - Self Resonant=8GHz, Inductance Frequency - Test="100 MHz", manufacturer="TDK Corporation", Operating Temperature="-55°C ~ 125°C", Q @ Freq="23 @ 250MHz", Supplier Part Number 1=445-MHQ1005P2N0BT000CT-ND, Tolerance=±0.1nH, componentlink1description=Datasheet, componentlink1url=https://product.tdk.com/info/en/catalog/datasheets/inductor_commercial_high-frequency_mhq1005p_en.pdf?ref_disty=digikey, componentlink2description="DigiKey Link", componentlink2url=https://www.digikey.com/en/products/detail/tdk-corporation/MHQ1005P2N0BT000/4742522, Height - Seated (Max)="0.024\" (0.60mm)", Inductance="2 nH", lastupdated="1/09/2022 1:22:23 PM", Lifecycle Status=Active, Material - Core="Ceramic, Non-Magnetic", Minimum Order=1, Mounting Type="Surface Mount", Package / Case="0402 (1005 Metric)", packaging=TapeAndReel, partid=1330, Part Number=MHQ1005P2N0BT000, Part Status=Active, price=0.06, series=MHQ-P, Shielding=Unshielded, Size / Dimension="0.039\" L x 0.024\" W (1.00mm x 0.60mm)", Supplier 1=DigiKey, Supplier Device Package="0402 (1005 Metric)", Type=Multilayer
L2: library part 0630CDMCCDS-100MC, "4A 10uH ±20% 67mO SMD,7x6.6x2.8mm Power Inductors ROHS"
Q1 Q2: "TRANS NPN 25V 1.5A SOT23", Current - Collector (Ic) (Max)="1.5 A", Current - Collector Cutoff (Max)=100nA, DC Current Gain (hFE) (Min) @ Ic, Vce="120 @ 100mA, 1V", Frequency - Transition=100MHz, manufacturer="Micro Commercial Co", Operating Temperature="-55°C ~ 150°C (TJ)", Package / Case="TO-236-3, SC-59, SOT-23-3", Power - Max="625 mW", Supplier Device Package=SOT-23, Supplier Part Number 1=MMSS8050-H-TPMSCT-ND, Voltage - Collector Emitter Breakdown (Max)="25 V", componentlink1description=Datasheet, componentlink1url=https://www.mccsemi.com/pdf/Products/MMSS8050(SOT-23).pdf, componentlink2description="DigiKey Link", componentlink2url=https://www.digikey.com/en/products/detail/micro-commercial-co/MMSS8050-H-TP/2696476, lastupdated="21/08/2022 9:04:56 PM", Lifecycle Status=Active, Minimum Order=1, Mounting Type="Surface Mount", packaging=TapeAndReel, partid=279, Part Number=MMSS8050-H-TP, Part Status=Active, price=0.03, series=-, Supplier 1=DigiKey, Transistor Type=NPN, Vce Saturation (Max) @ Ib, Ic="500mV @ 80mA, 800mA"
R1: library part RT0603FRE074K7L, "RES SMD 4.7K OHM 1% 1/10W 0603", Device Package="0603 (1608 Metric)", manufacturer=Yageo, Operating Temperature="-55°C ~ 155°C", Power (Watts)="0.1W, 1/10W", Supplier Device Package=0603, Supplier Part Number 1=YAG1238CT-ND, Temperature Coefficient=±50ppm/°C, Tolerance=±1%, componentlink1description=Datasheet, componentlink1url=https://www.yageo.com/upload/media/product/productsearch/datasheet/rchip/PYu-RT_1-to-0.01_RoHS_L_11.pdf, componentlink2description="DigiKey Link", componentlink2url=https://www.digikey.com/en/products/detail/yageo/RT0603FRE074K7L/1075404, Composition="Thin Film", Height - Seated (Max)="0.022\" (0.55mm)", lastupdated="21/08/2022 8:23:08 PM", Lifecycle Status=Active, Minimum Order=1, Number of Terminations=2, Package / Case="0603 (1608 Metric)", packaging=TapeAndReel, partid=5678, Part Number=RT0603FRE074K7L, Part Status=Active, price=0.01, Resistance="4.7 kOhms", series=RT, Size / Dimension="0.063\" L x 0.031\" W (1.60mm x 0.80mm)", Supplier 1=DigiKey
R2: library part RK73H1JTTD2402F, "RES 24K OHM 1% 1/10W 0603", Device Package="0603 (1608 Metric)", manufacturer="KOA Speer Electronics, Inc.", Operating Temperature="-55°C ~ 155°C", Power (Watts)="0.1W, 1/10W", Ratings=AEC-Q200, Supplier Device Package=0603, Supplier Part Number 1=2019-RK73H1JTTD2402FCT-ND, Temperature Coefficient=±100ppm/°C, Tolerance=±1%, componentlink1description=Datasheet, componentlink1url=http://www.koaspeer.com/catimages/Products/RK73H/RK73H.pdf, componentlink2description="DigiKey Link", componentlink2url=https://www.digikey.com/en/products/detail/koa-speer-electronics-inc/RK73H1JTTD2402F/9844964, Composition="Thick Film", Features="Automotive AEC-Q200, Moisture Resistant", Height - Seated (Max)="0.022\" (0.55mm)", lastupdated="21/08/2022 8:23:10 PM", Lifecycle Status=Active, Minimum Order=1, Number of Terminations=2, Package / Case="0603 (1608 Metric)", packaging=CutTape, partid=5156, Part Number=RK73H1JTTD2402F, Part Status=Active, price=0.01, Resistance="24 kOhms", series=RK73H, Size / Dimension="0.063\" L x 0.031\" W (1.60mm x 0.80mm)", Supplier 1=DigiKey
R3: library part RT0603FRE0747KL, "RES SMD 47K OHM 1% 1/10W 0603", Device Package="0603 (1608 Metric)", manufacturer=Yageo, Operating Temperature="-55°C ~ 155°C", Power (Watts)="0.1W, 1/10W", Supplier Device Package=0603, Supplier Part Number 1=YAG3355CT-ND, Temperature Coefficient=±50ppm/°C, Tolerance=±1%, componentlink1description=Datasheet, componentlink1url=https://www.yageo.com/upload/media/product/productsearch/datasheet/rchip/PYu-RT_1-to-0.01_RoHS_L_11.pdf, componentlink2description="DigiKey Link", componentlink2url=https://www.digikey.com/en/products/detail/yageo/RT0603FRE0747KL/1075386, Composition="Thin Film", Height - Seated (Max)="0.022\" (0.55mm)", lastupdated="21/08/2022 8:23:08 PM", Lifecycle Status=Active, Minimum Order=1, Number of Terminations=2, Package / Case="0603 (1608 Metric)", packaging=TapeAndReel, partid=5674, Part Number=RT0603FRE0747KL, Part Status=Active, price=0.01, Resistance="47 kOhms", series=RT, Size / Dimension="0.063\" L x 0.031\" W (1.60mm x 0.80mm)", Supplier 1=DigiKey
R4: library part RMCF0603JT510R, "RES 510 OHM 5% 1/10W 0603", Device Package="0603 (1608 Metric)", manufacturer="Stackpole Electronics Inc", Operating Temperature="-55°C ~ 155°C", Power (Watts)="0.1W, 1/10W", Ratings=AEC-Q200, Supplier Device Package=0603, Supplier Part Number 1=RMCF0603JT510RCT-ND, Temperature Coefficient=±200ppm/°C, Tolerance=±5%, componentlink1description=Datasheet, componentlink1url=https://www.seielect.com/catalog/sei-rmcf_rmcp.pdf, componentlink2description="DigiKey Link", componentlink2url=https://www.digikey.com/en/products/detail/stackpole-electronics-inc/RMCF0603JT510R/1757941, Composition="Thick Film", Features="Automotive AEC-Q200", Height - Seated (Max)="0.022\" (0.55mm)", lastupdated="25/08/2022 7:11:50 AM", Lifecycle Status=Active, Minimum Order=1, Number of Terminations=2, Package / Case="0603 (1608 Metric)", packaging=CutTape, partid=5929, Part Number=RMCF0603JT510R, Part Status=Active, price=0.01, Resistance="510 Ohms", series=RMCF, Size / Dimension="0.061\" L x 0.031\" W (1.55mm x 0.80mm)", Supplier 1=DigiKey
R5 R6: library part RCS060310K0JNEA, "RES SMD 10K OHM 5% 1/4W 0603", Device Package="0603 (1608 Metric)", manufacturer="Vishay Dale", Operating Temperature="-55°C ~ 155°C", Power (Watts)="0.25W, 1/4W", Ratings=AEC-Q200, Supplier Device Package=0603, Supplier Part Number 1=541-2817-1-ND, Temperature Coefficient=±200ppm/°C, Tolerance=±5%, componentlink1description=Datasheet, componentlink1url=http://www.vishay.com/docs/20065/rcse3.pdf, componentlink2description="DigiKey Link", componentlink2url=https://www.digikey.com/en/products/detail/vishay-dale/RCS060310K0JNEA/5866963, Composition="Thick Film", Features="Automotive AEC-Q200, Pulse Withstanding", Height - Seated (Max)="0.020\" (0.50mm)", lastupdated="25/08/2022 7:11:51 AM", Lifecycle Status=Active, Minimum Order=1, Number of Terminations=2, Package / Case="0603 (1608 Metric)", packaging=TapeAndReel, partid=5383, Part Number=RCS060310K0JNEA, Part Status=Active, price=0.01, Resistance="10 kOhms", series="RCS e3", Size / Dimension="0.061\" L x 0.033\" W (1.55mm x 0.85mm)", Supplier 1=DigiKey
R7 R8: library part RK73B1JTTD512J, "RES 5.1K OHM 5% 1/10W 0603", Device Package="0603 (1608 Metric)", manufacturer="KOA Speer Electronics, Inc.", Operating Temperature="-55°C ~ 155°C", Power (Watts)="0.1W, 1/10W", Ratings=AEC-Q200, Supplier Device Package=0603, Supplier Part Number 1=2019-RK73B1JTTD512JCT-ND, Temperature Coefficient=±200ppm/°C, Tolerance=±5%, componentlink1description=Datasheet, componentlink1url=http://www.koaspeer.com/catimages/Products/RK73B/RK73B.pdf, componentlink2description="DigiKey Link", componentlink2url=https://www.digikey.com/en/products/detail/koa-speer-electronics-inc/RK73B1JTTD512J/9844732, Composition="Thick Film", Features="Automotive AEC-Q200", Height - Seated (Max)="0.022\" (0.55mm)", lastupdated="25/08/2022 7:11:50 AM", Lifecycle Status=Active, Minimum Order=1, Number of Terminations=2, Package / Case="0603 (1608 Metric)", packaging=CutTape, partid=5969, Part Number=RK73B1JTTD512J, Part Status=Active, price=0.01, Resistance="5.1 kOhms", series=RK73B, Size / Dimension="0.063\" L x 0.031\" W (1.60mm x 0.80mm)", Supplier 1=DigiKey
R9 R14: library part RC1210JR-070RL, "RES 0 OHM JUMPER 1/2W 1210", Device Package="1210 (3225 Metric)", manufacturer=Yageo, Operating Temperature="-55°C ~ 155°C", Power (Watts)="0.5W, 1/2W", Supplier Device Package=1210, Supplier Part Number 1=YAG3375CT-ND, Tolerance=Jumper, componentlink1description=Datasheet, componentlink1url=https://www.yageo.com/upload/media/product/productsearch/datasheet/rchip/PYu-RC_Group_51_RoHS_L_10.pdf, componentlink2description="DigiKey Link", componentlink2url=https://www.digikey.com/en/products/detail/yageo/RC1210JR-070RL/5919839, Composition="Thick Film", Features="Moisture Resistant", Height - Seated (Max)="0.024\" (0.60mm)", lastupdated="9/08/2022 12:50:16 PM", Lifecycle Status=Active, Minimum Order=1, Number of Terminations=2, Package / Case="1210 (3225 Metric)", packaging=TapeAndReel, Part Number=RC1210JR-070RL, Part Status=Active, price=0.01, Resistance="0 Ohms", series=RC_L, Size / Dimension="0.122\" L x 0.102\" W (3.10mm x 2.60mm)", Supplier 1=DigiKey
R10 R11 R12 R13: library part RNCS0603BKE10K0, "RES 10K OHM 0.1% 1/16W 0603", Device Package="0603 (1608 Metric)", manufacturer="Stackpole Electronics Inc", Operating Temperature="-55°C ~ 155°C", Power (Watts)="0.063W, 1/16W", Ratings=AEC-Q200, Supplier Device Package=0603, Supplier Part Number 1=RNCS0603BKE10K0CT-ND, Temperature Coefficient=±25ppm/°C, Tolerance=±0.1%, componentlink1description=Datasheet, componentlink1url=https://www.seielect.com/catalog/sei-rncs_rnch.pdf, componentlink2description="DigiKey Link", componentlink2url=https://www.digikey.com/en/products/detail/stackpole-electronics-inc/RNCS0603BKE10K0/1708836, Composition="Thin Film", Features="Anti-Corrosive, Automotive AEC-Q200, Moisture Resistant", Height - Seated (Max)="0.022\" (0.55mm)", lastupdated="27/08/2022 7:54:13 AM", Lifecycle Status=Active, Minimum Order=1, Number of Terminations=2, Package / Case="0603 (1608 Metric)", packaging=TapeAndReel, partid=4838, Part Number=RNCS0603BKE10K0, Part Status=Active, price=0.08, Resistance="10 kOhms", series=RNCS, Size / Dimension="0.061\" L x 0.031\" W (1.55mm x 0.80mm)", Supplier 1=DigiKey
R15: library part RP73PF1E100KBTD, "RES 100K OHM 0.1% 1/10W 0402", Device Package="0402 (1005 Metric)", manufacturer="TE Connectivity Passive Product", Operating Temperature="-55°C ~ 155°C", Power (Watts)="0.1W, 1/10W", Supplier Device Package=0402, Supplier Part Number 1=A127511CT-ND, Temperature Coefficient=±25ppm/°C, Tolerance=±0.1%, componentlink1description=Datasheet, componentlink1url=https://www.te.com/commerce/DocumentDelivery/DDEController?Action=srchrtrv&DocNm=1773272&DocType=DS&DocLang=English, componentlink2description="DigiKey Link", componentlink2url=https://www.digikey.com/en/products/detail/te-connectivity-passive-product/RP73PF1E100KBTD/8261053, Composition="Thin Film", Height - Seated (Max)="0.014\" (0.35mm)", lastupdated="9/08/2022 12:11:04 PM", Lifecycle Status=Active, Minimum Order=1, Number of Terminations=2, Package / Case="0402 (1005 Metric)", packaging=TapeAndReel, partid=2436, Part Number=RP73PF1E100KBTD, Part Status=Active, price=0.09, Resistance="100 kOhms", series="RP73, Holsworthy", Size / Dimension="0.039\" L x 0.020\" W (1.00mm x 0.50mm)", Supplier 1=DigiKey
R16: library part CPF0402B32K4E1, "RES SMD 32.4KOHM 0.1% 1/16W 0402", Device Package="0402 (1005 Metric)", manufacturer="TE Connectivity Passive Product", Operating Temperature="-55°C ~ 155°C", Power (Watts)="0.063W, 1/16W", Supplier Device Package=0402, Supplier Part Number 1=A102795CT-ND, Temperature Coefficient=±25ppm/°C, Tolerance=±0.1%, componentlink1description=Datasheet, componentlink1url=https://www.te.com/commerce/DocumentDelivery/DDEController?Action=srchrtrv&DocNm=1773200&DocType=DS&DocLang=English, componentlink2description="DigiKey Link", componentlink2url=https://www.digikey.com/en/products/detail/te-connectivity-passive-product/CPF0402B32K4E1/2382531, Composition="Thin Film", Height - Seated (Max)="0.014\" (0.35mm)", lastupdated="9/08/2022 12:10:59 PM", Lifecycle Status=Active, Minimum Order=1, Number of Terminations=2, Package / Case="0402 (1005 Metric)", packaging=TapeAndReel, partid=4116, Part Number=CPF0402B32K4E1, Part Status=Active, price=0.15, Resistance="32.4 kOhms", series="CPF, Neohm", Size / Dimension="0.039\" L x 0.020\" W (1.00mm x 0.50mm)", Supplier 1=DigiKey
R17 R19 R20 R22: library part CRT0603-BY-10R0ELF, "RES SMD 10 OHM 0.1% 1/10W 0603", Device Package="0603 (1608 Metric)", manufacturer="Bourns Inc.", Operating Temperature="-55°C ~ 155°C", Power (Watts)="0.1W, 1/10W", Supplier Device Package=0603, Supplier Part Number 1=CRT0603-BY-10R0ELFCT-ND, Temperature Coefficient=±25ppm/°C, Tolerance=±0.1%, componentlink1description=Datasheet, componentlink1url=https://www.bourns.com/docs/Product-Datasheets/crt.pdf, componentlink2description="DigiKey Link", componentlink2url=https://www.digikey.com/en/products/detail/bourns-inc/CRT0603-BY-10R0ELF/1775018, Composition="Thin Film", Features="Current Sense", Height - Seated (Max)="0.024\" (0.60mm)", lastupdated="19/09/2022 1:22:34 PM", Lifecycle Status=Active, Minimum Order=1, Number of Terminations=2, Package / Case="0603 (1608 Metric)", packaging=TapeAndReel, partid=4866, Part Number=CRT0603-BY-10R0ELF, Part Status=Active, price=0.04, Resistance="10 Ohms", series=CRT, Size / Dimension="0.061\" L x 0.031\" W (1.55mm x 0.80mm)", Supplier 1=DigiKey
R18 R21: library part PCS1206FR0020ET, "1W 0.002 OHMS 1% 1206", Device Package="1206 (3216 Metric)", manufacturer=Ohmite, Operating Temperature="-55°C ~ 170°C", Package / Case=1206, Power (Watts)=1W, Ratings=AEC-Q200, Supplier Part Number 1=273-PCS1206FR0020ETCT-ND, Temperature Coefficient=±50ppm/°C, Tolerance=±1%, componentlink2description="DigiKey Link", componentlink2url=https://www.digikey.com/en/products/detail/ohmite/PCS1206FR0020ET/10670849, Composition="Metal Film", Features="Current Sense", Height - Seated (Max)="0.035\" (0.88mm)", lastupdated="19/09/2022 1:42:39 PM", Lifecycle Status=Active, Minimum Order=1, Number of Terminations=2, packaging=TapeAndReel, partid=2876, Part Number=PCS1206FR0020ET, Part Status=Active, price=0.21, Resistance="2 mOhms", series=PCS, Size / Dimension="0.126\" L x 0.065\" W (3.20mm x 1.65mm)", Supplier 1=DigiKey, Supplier Device Package=1206
S1 S2: "No NO SMDSplicing 50mA 3.9mm 100MO 100000 12V 250gf@±30gf 2.9mm -30?~+85? 2.5mm Black Round Button Brick nogging SPST SMD Tactile Switches ROHS"
S3: "Lying SPDT 9.5mm PCPin 5000 Rectangular columnar -25?~+70? Plugin Slide Switches ROHS SP#C136722"
U1: "USB-to-UART 1-CH 576byte FIFO 3.3V 24-Pin QFN EP T/R", Package=None, Availability=Unavailable, MF="{'manufacturer': u'Silicon Labs'}", MP=CP2104-F03-GM, price=None
U2: "Bluetooth, WiFi 802.11b/g/n, Bluetooth v4.2 +EDR, Class 1, 2 and 3 Transceiver Module 2.4GHz ~ 2.5GHz Surface Mount", Package=None, Availability=Unavailable, MF="{'manufacturer': u'Espressif Systems'}", MP=ESP32-PICO-D4, price=None
U3: library part LY68L6400SLIT, "64M Bits Serial Pseudo-SRAM with SPI and QPI"
U4: "RICHTEK 1.2A, 24V, 700kHz Step-Down Converter SOT23-6"

## Free pads (board coordinates)
  round 275.59 hole 157.48: 2(2461,1880) 2(2461,3393) 2(4049,1875) 2(4049,3393)
  round 60 hole 30: 4(3662,3130) 7(3710,3250) 7(3762,3130)

## Via types
v1: diameter 23, hole 15, Top Layer to Bottom Layer, tented both sides, 43 vias
v2: diameter 16, hole 8, Top Layer to Bottom Layer, tented bottom, 21 vias
v3: diameter 16, hole 10, Top Layer to Bottom Layer, tented both sides, 18 vias
v4: diameter 23, hole 15, Top Layer to Bottom Layer, tented bottom, 9 vias
v5: diameter 40, hole 30, Top Layer to Bottom Layer, tented both sides, 2 vias
v6: diameter 16, hole 15, Top Layer to Bottom Layer, tented both sides, 1 vias
v7: diameter 28, hole 20, Top Layer to Bottom Layer, tented both sides, 1 vias

## Nets (pads, with @x,y where several pads share a name; then routed paths per layer and width w, separated by ;. In a path a pad name is that pad's centre, name@x,y a point inside that pad or via, vN(x,y) a via of type N, cw(c..) or ccw(c..) an arc to the next point about the centre after c; other vN are vias at no path point)
3V3: C1.2 C2.1 C3.2 C4.1 C5.2 C7.1 C8.2 C9.2 C10.2 C11.2 C13.1 C14.2 C15.2 J5.1 L1.2 R1.2 R5.1 R6.1 R10.1 R11.1 R12.1 R13.1 R14.2 U1.5 U1.6 U1.7 U2.1 U2.19 U2.37 U2.43 U2.46 U3.8 U5.1 U5.6 U6.1 U6.2 U6.6 | length 7483
  Top Layer w10: C2.1 C2.1@3237.4,3053.15 ; U1.7@3318.58,3053.27 U1.7
  Top Layer w15: C11.2@3135.61,2384.67 C11.2 ; C10.2@3135.61,2450.1 C10.2 C10.2@3137.83,2452.76 ; C1.2 3353.15,3120.28 ; C2.1@3237.4,3053.15 U1.7 ; C5.2 3322.83,2668.31 3324.8,2666.34 U2.46 ; U1.6 3346.46,3113.58 3353.15,3120.28 ; U1.5 3366.14,3107.28 3353.15,3120.28 ; v4(3374,2257) 3375.53,2258.53 3391.53,2258.53 3400.59,2267.59 C15.2 3403.25,2295.96 3403.25,2351.48 U2.19 ; U2.43 3383.86,2661.48 3377,2668.34 C8.2 ; U2.37 3501.97,2618.97 3524,2641 3524,2713.4 3513.7,2723.7 C3.2 ; U6.1 3733,2733.72 ; R11.1 3652,2767 3663,2756 3733,2756 ; U5.1 3652.13,2986.87 3775.87,2986.87 3775.87,3024.13 3752,3048 3700.18,3048 R10.1 ; U6.2@3653.99,2716.03 3724.03,2716.03 3733,2725 3733,2733.72 ; C7.1 3624,2328 3612.2,2339.8 v1(3612.2,2358.27) 3612.2,2393.5 3613.19,2394.49 U3.8 3742.32,2396.46 3772.64,2366.14 R6.1@3772.64,2330.71 ; R13.1 3762.59,2644.59 3772.98,2654.98 U6.6 3846.85,2654.98 3857,2644.84 3857,2625 3870.15,2611.85 C14.2 v1(3895,2577) ; R12.1 3764.59,2846 3818,2846 3842,2822 ; U5.6 3845,2908 3857,2896 3857,2875.11 3867.68,2864.43 C13.1 3895.5,2863.93 3895.5,2822.5 v1(3896,2822) 3842,2822 ; 3733,2733.72 3733,2756 ; 3733,2756 3733,2766 3771.17,2804.17 3824.17,2804.17 3842,2822
  Top Layer w20: C9.2 3136.81,2524.21 3152.4,2539.8 L1.2@3191.34,2539.8 ; 3181.1,2677.17 R1.2 ; C4.1 3259.25,2596.69 U2.1@3265.16,2590.79
  Top Layer w30: C10.2 C9.2@3135.39,2520.83 ; C11.2@3135.61,2384.67 C10.2@3135.61,2450.1 ; C11.2 v5(3135.83,2311.02) 3135.83,2236.22 3145.67,2226.38 R5.1 ; C2.1 C1.2 ; v7(3471,2723.43) C3.2
  Top Layer w40: J5.1@2937.01,2677.17 J5.1 3137.8,2677.17 ; C9.2@3135.39,2520.83 C9.2 ; 3141.93,2677.17 3181.1,2677.17 C4.1 C5.2 C8.2
  Top Layer w50: R14.2 2815.94,2556.1 J5.1@2937.01,2677.17
  Bottom Layer w15: v5(3135.83,2311.02) 3179.13,2311.02 3233.16,2257 v4(3374,2257)
  Bottom Layer w25: 3612.2,2106.3 v1(3612.2,2358.27)
  Bottom Layer w30: J5.1 3232,2963.3 v4(3232,3089) ; 3135.83,2609.17 3249.65,2723 v7@3471,2723
  Bottom Layer w40: J5.1 3067.83,2677.17 3135.83,2609.17 v5(3135.83,2311.02) 3135.83,2178.15 3212.6,2101.38 3612.2,2101.38 3659.38,2101.38 3896,2338 3896,2577 3896,2867 v1(3776,2987)
GND: C1.1 C2.2 C3.1 C4.2 C5.1 C6.2 C7.2 C8.1 C9.1 C10.1 C11.1 C12.1 C13.2 C14.1 C15.1 C16.1 C18.2 D1.2 D2.2 D4.1 J1.A1 J1.A12 J1.B1 J1.B12 J1.S1 J1.S2 J2.A1 J2.A12 J2.B1 J2.B12 J2.S J3.A1 J3.A12 J3.B1 J3.B12 J3.S J4.1 pad.2 pad.7@3710,3250 R3.1 R7.1 R8.2 R16.1 S1.2 S2.1 S3.4 S3.5 U1.2 U1.25 U2.22 U2.49 U3.4 U4.2 U5.2 U5.7 U6.7 | length 3411.3
  Top Layer w15: v4(2376,2619) 2444.87,2619 2445.87,2618 2446.87,2617 v4(2514,2617) ; v4(2376,2667) 2422.57,2667 D4.1@2423.23,2666.34 ; D4.1 2469.17,2667 v4(2514,2667) ; J3.S@3227.56,3272.05 3227.56,3284.07 3244.69,3301.2 3269.31,3301.2 J3.B1 3279.53,3303.54 J3.A12 ; v1(3350.39,3152.56) D2.2 ; S2.1 3371.6,2032 v1(3407.59,2032) 3437.4,2032 3439.4,2034 S1.2@3439.4,2023.17 ; U1.2 3425.2,3109 3444.88,3128.68 v1(3444.88,3152.56) D1.2 ; v1(3452,2319) 3462.6,2329.6 U2.22 ; C3.1@3512.93,2777.07 v1@3512.93,2811.5 ; J3.A1 3515.75,3303.15 J3.B12 ; C3.1@3526.43,2771 C3.1@3526.93,2770.5 ; R8.2 3567.72,3193.7 J3.S@3567.72,3272.05 ; U5.2 3719.94,2967.06 3759.31,2927.69 U5.7 3884.31,2927.69 C13.2@3895,2917 ; U6.7 C14.1@3895,2674.67 ; C14.1 3896,2664 3931,2664 v1(3932,2663) ; C13.2 3896.21,2918.79 3922.21,2918.79 3939,2902 v1(3939,2885) ; J2.S@4328.17,1978.05 4328.17,1990.07 4330.84,1992.74 4371.26,1992.74 J2.B1 4380.84,1994.46 J2.A12 ; J1.B1 4374,1734 4358.5,1749.5 J1.S1 4362.43,1796.99 J1.A12@4399.22,1796.99 ; J1.B12 4630,1734 4649.83,1753.83 J1.S2 4645.9,1796.99 J1.A1@4618.95,1796.99 ; J2.A1 4617,1946.88 4617,1994 J2.B12 4627.28,1991.72 4652.3,1991.72 4669.03,1974.99 J2.S@4669.03,1962.96 ; J2.S@4668.32,1978.05 J2.S@4668.32,1990.07
  Top Layer w20: U4.2 2726.22,2800.35 2779.69,2800.35 2781.5,2798.54 R16.1 v1(2781.5,2757.87) ; v1(3030.51,2522.24) C9.1 3078.03,2518.03 3078.03,2454.53 C10.1 ; v1(3037.4,2385.83) 3037.98,2385.25 3081.87,2385.25 3082.46,2385.84 3082.46,2450.1 C10.1 ; v1(3037.4,2450.1) 3037.51,2450.21 3082.14,2450.21 C10.1 ; v1(3142.52,3057.28) C2.2 C1.1 3180.61,3120.77 3180.61,3169.96 3193.9,3183.24 v1(3193.9,3184.06) 3194.39,3184.55 3235.73,3184.55 R7.1 ; v1(3144.49,2928.15) 3144.98,2927.66 3180.61,2927.66 R3.1 ; v1(3259.25,2775.59) C4.2 C5.1 3385.13,2730.31 3385.48,2730.66 3385.48,2775.24 v1(3385.13,2775.59) ; C12.1@3271.16,2291.83 3345.96,2291.83 C15.1 ; v1(3307.09,2862.2) C6.2 ; J3.B12 3523.46,3303.31 3549.83,3303.31 3567.72,3285.43 J3.S@3567.72,3272.05 ; C7.2@3708.66,2330.71 3709.15,2331.2 v1(3709.15,2368.6) ; v1(3823,2574) 3823,2547.28 U3.4@3824.02,2546.26
  Top Layer w40: v4(2392,2316) 2392,2527 2445.87,2580.87 2445.87,2618 D4.1 2423.23,2666.34 C16.1 ; C16.1@2446,2782 v4(2477,2782)
  other v1: 3512.43,2812
  other v2: 3357.28,2406.5 3430.12,2406.5 3319.88,2443.9 3357.28,2443.9 3392.72,2443.9 3430.12,2443.9 3466.54,2443.9 3357.28,2479.33 3430.12,2479.33 3320.87,2516.73 3357.28,2516.73 3393.7,2516.73 3430.12,2516.73 3466.54,2516.73 3430.12,2555.12 3357.28,2556.1 3395.67,2978.94 3370.67,3003.94 3395.67,3003.94 3420.67,3003.94 3395.67,3028.94
  other v4: 3313,2291.83
NetC6_1: C6.1 U1.16 | length 73
  Top Layer w10: C6.1@3405.51,2855.32 C6.1@3406.5,2854.33
  Top Layer w15: C6.1@3405.51,2855.32 U1.16
NetC12_2: C12.2 Q1.3 R5.2 S2.2 U2.9 | length 500.3
  Top Layer w15: S2.2 3195.63,2035.22 3195.63,2177.91 R5.2 ; C12.2 3196.85,2280.51 R5.2 ; C12.2@3208.66,2290.35 3208.66,2400.59 3239.17,2431.1 U2.9 ; C12.2@3211.61,2288.39 C12.2@3211.61,2290.35 ; Q1.3 3253.44,2178.64 3197.34,2178.64 R5.2
NetC16_2: C16.2 J7.1 R9.2 U4.5 | length 408
  Top Layer w25: R9.2 2527.26,2868.11 R9.2@2537.4,2857.97 ; C16.2 2537.4,2803.15 U4.5
  Top Layer w40: J7.1 2376.97,2890.75 2399.61,2868.11 R9.2
  Top Layer w50: C16.2@2537.4,2803.15 R9.2@2537.4,2857.97
NetC17_1: C17.1 D4.2 L2.1 U4.6 | length 410.6
  Top Layer w15: U4.6@2615.45,2764.07 2642.03,2764.07 2652.95,2775 C17.1
  Top Layer w25: U4.6@2614.17,2762.5 2615.45,2763.78 U4.6@2615.45,2764.07
  Top Layer w30: D4.2@2614.17,2643.7 U4.6@2614.17,2762.5
  Top Layer w70: L2.1@2614.17,2526.57 D4.2@2614.17,2643.7